# Altium PCB Battery supply.PcbDoc
Units mm, origin at the board's own origin, x right, y up, seen from the top; angles counter-clockwise.
Board outline 52.07 x 102.87 mm, 2 copper layers (Top Layer, Bottom Layer); 32 components, 14 nets, 111 pads, 35 vias.
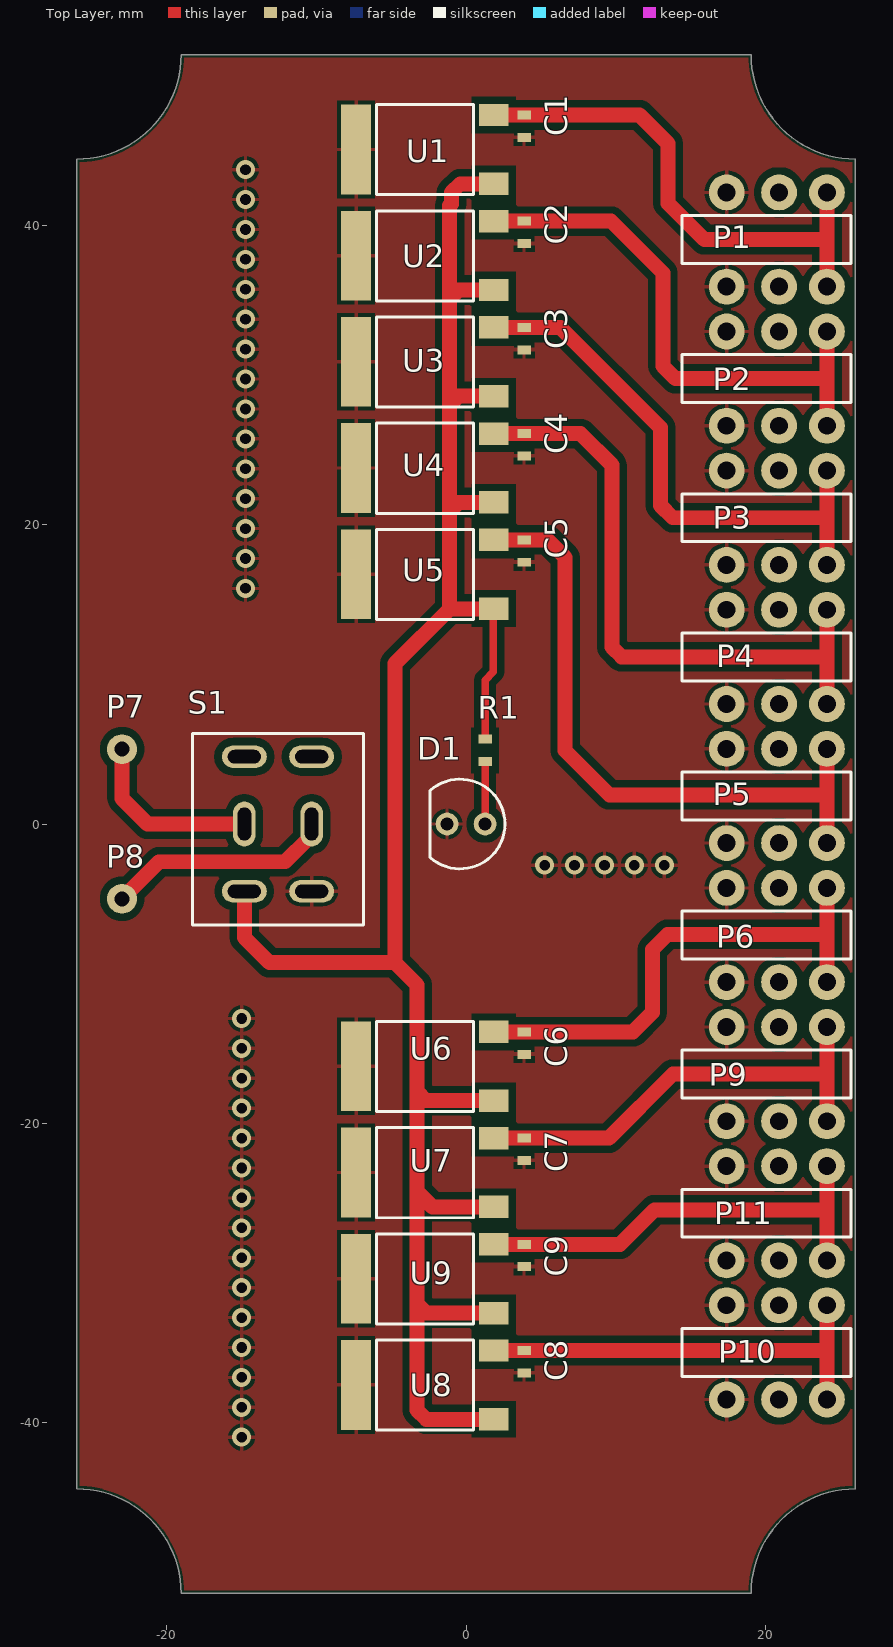
[diagram p0: Top Layer view]
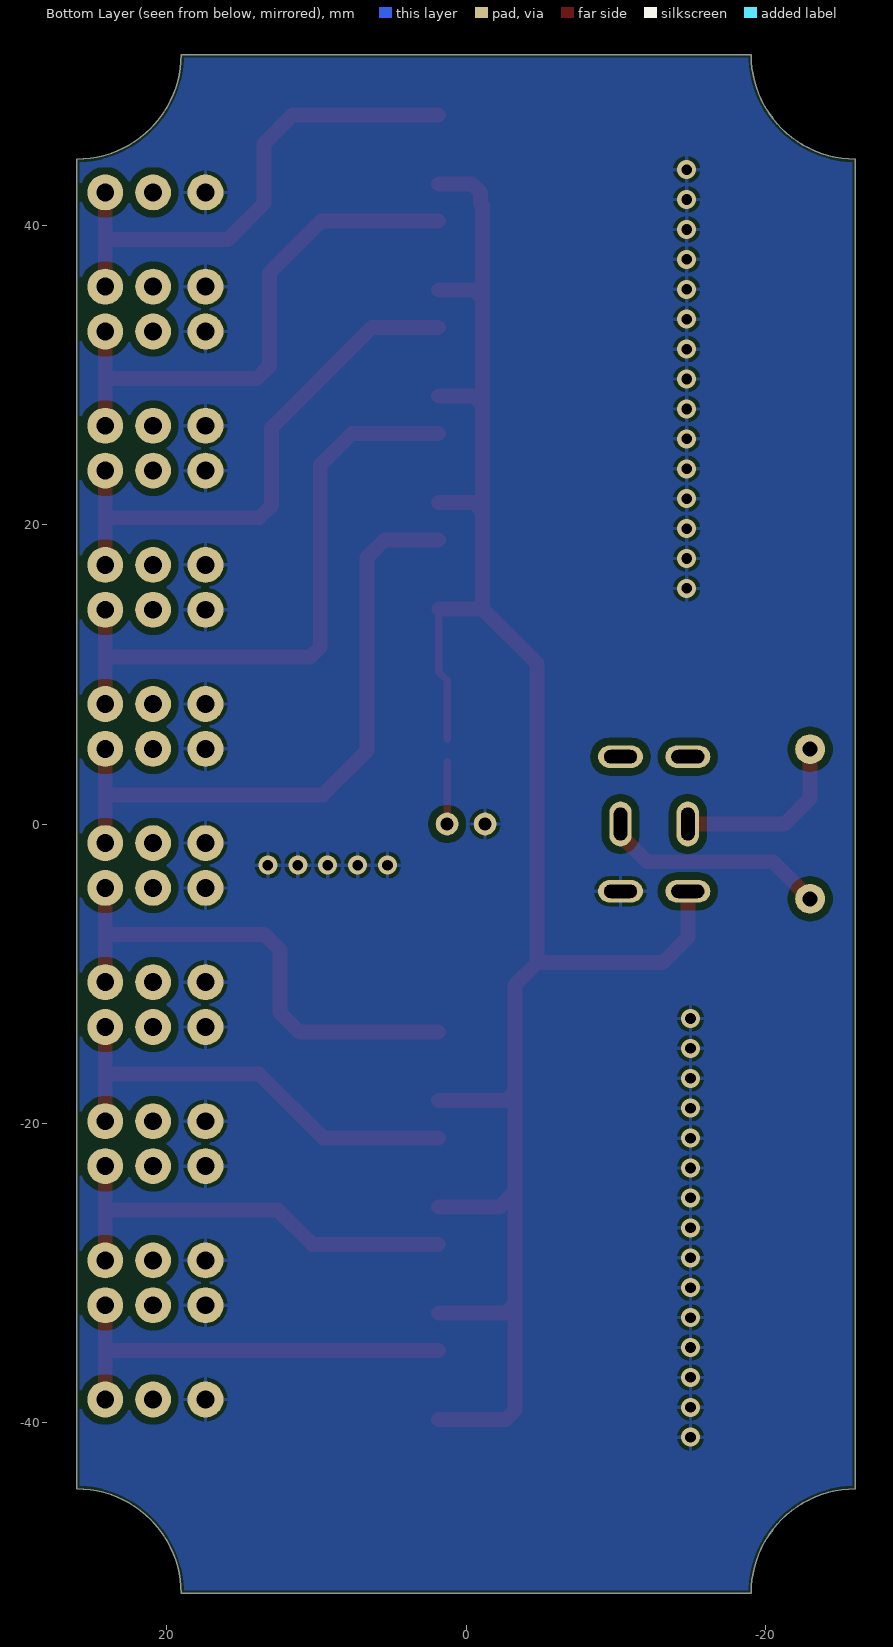
[diagram p1: Bottom Layer view, seen from below]
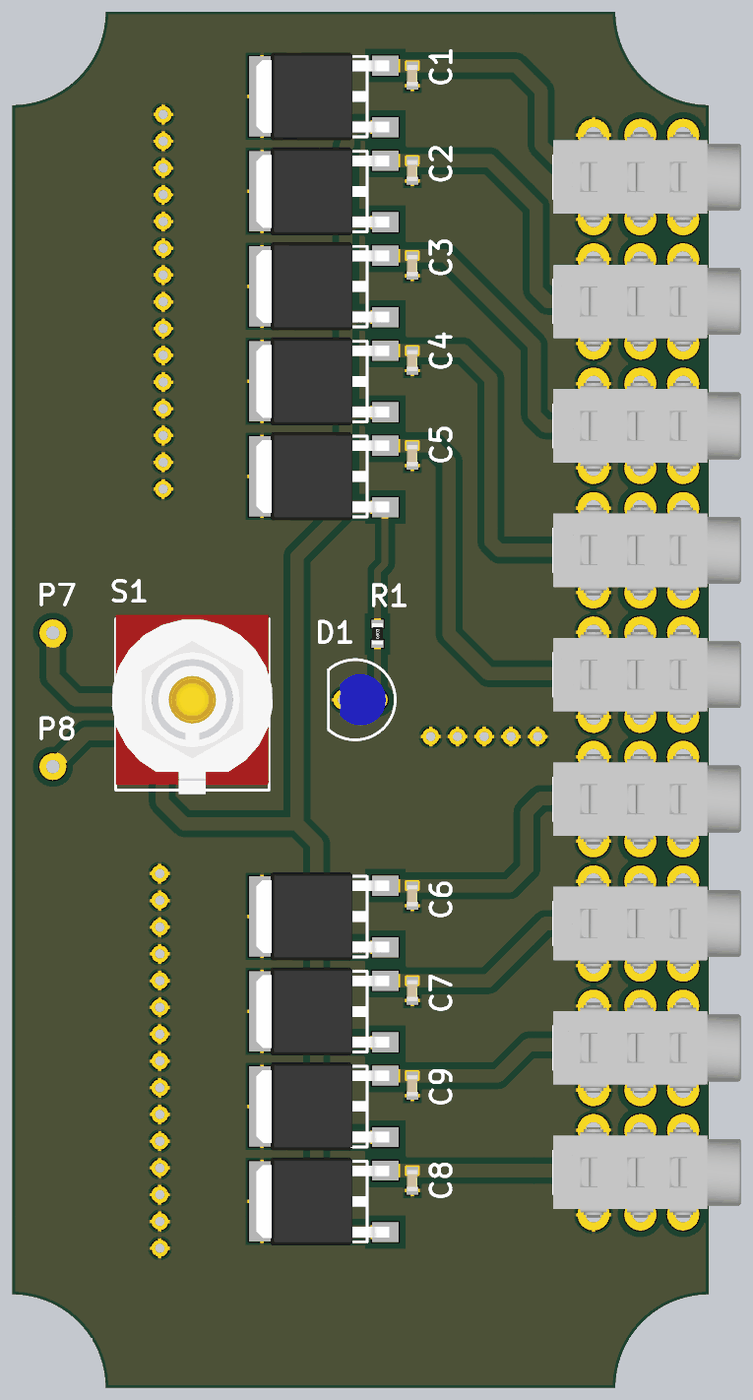
[diagram p2: 3D render of the assembled board from above, using the file's embedded part models]

## Layer stack, top to bottom
Top Solder: solder mask 0.0102, Solder Resist, Dk 3.5
Top Layer: signal copper 0.0356
Dielectric 1: dielectric 0.32, FR-4, Dk 4.8
Bottom Layer: signal copper 0.0356
Bottom Solder: solder mask 0.0102, Solder Resist, Dk 3.5

## Board outline
-26.035,-44.45 -26.035,44.45 ccw(c-26.035,51.435) -19.05,51.435 19.05,51.435 ccw(c26.035,51.435) 26.035,44.45 26.035,-44.45 ccw(c26.035,-51.435) 19.05,-51.435 -19.05,-51.435 ccw(c-26.035,-51.435)

## Design rules (kind name [scope] priority, off if disabled: settings)
BoardOutlineClearance [All] p1: gap=0.2 ignorepadtopadclearanceinfootprint=FALSE
Clearance [All] p1: gap=0.5 ignorepadtopadclearanceinfootprint=FALSE
Height [All] p1: minheight=0 maxheight=50 prefheight=12.7
HoleSize [All] p1: absolutevalues=TRUE maxlimit=6.3 minlimit=0.3 maxpercent=80.000 minpercent=20.000
HoleToHoleClearance [All] p1: gap=0.5 allowstackedmicrovias=TRUE
MinimumSolderMaskSliver [All] p1: minsoldermaskwidth=0.1
PolygonConnect [All] p1: connectstyle=Relief reliefconductorwidth=0.254 reliefentries=4 polygonreliefangle="90 Angle" airgapwidth=0.254
RoutingVias [All] p1: holewidth=0.5 width=1 viastyle="Through Hole" minholewidth=0.5 minwidth=1 maxholewidth=0.5 maxwidth=1
SilkToSilkClearance [All] p1: silktosilkclearance=0.1
SilkToSolderMaskClearance [IsPad] p1: minsilkscreentomaskgap=0.1 clearancetoexposedcopper=TRUE
SolderMaskExpansion [All] p1: expansion=0.102 istentingtop=FALSE
Width [All] p1: maxlimit=10 minlimit=0.5 preferedwidth=1
24 further rules are at their usual default settings.

## Components (designator, comment, footprint, x,y, rotation, side; value= is the part's Value field where it differs from the comment)
C1 "22μ 10V" "CAPACITOR 0603" 3.875,46.65 r90 top
C2 "22μ 10V" "CAPACITOR 0603" 3.875,39.55 r90 top
C3 "22μ 10V" "CAPACITOR 0603" 3.875,32.45 r90 top
C4 "22μ 10V" "CAPACITOR 0603" 3.875,25.35 r90 top
C5 "22μ 10V" "CAPACITOR 0603" 3.875,18.25 r90 top
C6 "22μ 10V" "CAPACITOR 0603" 3.875,-14.65 r90 top
C7 "22μ 10V" "CAPACITOR 0603" 3.875,-21.75 r90 top
C8 "22μ 10V" "CAPACITOR 0603" 3.875,-35.95 r90 top
C9 "22μ 10V" "CAPACITOR 0603" 3.875,-28.85 r90 top
D1 "Blue 3mm" "LED 3MM BLUE" 0,0 r0 top
P1 "PJ-3136-B" PJ-3136-B 25.925,39.075 r270 top
P2 "PJ-3136-B" PJ-3136-B 25.925,29.775 r270 top
P3 "PJ-3136-B" PJ-3136-B 25.925,20.475 r270 top
P4 "PJ-3136-B" PJ-3136-B 25.925,11.175 r270 top
P5 "PJ-3136-B" PJ-3136-B 25.925,1.875 r270 top
P6 "PJ-3136-B" PJ-3136-B 25.925,-7.425 r270 top
P7 "PAd" PAD -23,5 r90 top
P8 "PAd" PAD -23,-5 r90 top
P9 "PJ-3136-B" PJ-3136-B 25.925,-16.725 r270 top
P10 "PJ-3136-B" PJ-3136-B 25.925,-35.325 r270 top
P11 "PJ-3136-B" PJ-3136-B 25.925,-26.025 r270 top
R1 "1k" "RESISTOR 0603" 1.275,4.925 r90 top
S1 "1FD3T1B6M1QES-5" 1FD3T1B6M1QES-5 -12.575,0 r180 top
U1 "KIA78D09F-RTF/P" KIA78D09F-RTF/P 1.85,45.1 r90 top
U2 "KIA78D09F-RTF/P" KIA78D09F-RTF/P 1.85,38 r90 top
U3 "KIA78D09F-RTF/P" KIA78D09F-RTF/P 1.85,30.9 r90 top
U4 "KIA78D09F-RTF/P" KIA78D09F-RTF/P 1.85,23.8 r90 top
U5 "KIA78D09F-RTF/P" KIA78D09F-RTF/P 1.85,16.7 r90 top
U6 "KIA78D09F-RTF/P" KIA78D09F-RTF/P 1.85,-16.2 r90 top
U7 "KIA78D09F-RTF/P" KIA78D09F-RTF/P 1.85,-23.3 r90 top
U8 "KIA78D09F-RTF/P" KIA78D09F-RTF/P 1.85,-37.5 r90 top
U9 "KIA78D09F-RTF/P" KIA78D09F-RTF/P 1.85,-30.4 r90 top

## Footprints (in the part's own frame and the unit in brackets; to place one, negate y for a bottom-side part, rotate by r counter-clockwise, add the part's x,y. Pads: shape width x height; smd on the part's side, far side on the other; paste and mask are expansions set on the pad)
1FD3T1B6M1QES-5 [mm]
  oval 3x1.5 hole 0.9 slot 2.2 at 0 deg: 1(2.25,-4.5) 3(2.25,4.5) 4(-2.25,-4.5) 6(-2.25,4.5)
  oval 1.5x3 hole 0.9 slot 2.2 at 90 deg: 2(2.25,0) 5(-2.25,0)
  silkscreen extent -5.72,-6.05 5.72,6.75, body extent -6.03,-6.35 6.03,7.05, height 28.83
"CAPACITOR 0603" [mm]
  rect 0.6x0.9 smd: 1(-0.75,0) 2(0.75,0)
  body extent -0.8,-0.4 0.8,0.4, height 0.8
KIA78D09F-RTF/P [mm]
  rect 1.5x2 smd: 1(-2.3,0) 3(2.3,0)
  rect 6x2 smd: 2(0,9.2)
  silkscreen extent -3.03,1.35 3,7.85, body extent -3.29,-0.29 3.29,9.65, height 2.29
"LED 3MM BLUE" [mil]
  round 60 hole 33.46: 1(-50,0) 2(50,0)
  silkscreen extent -94,-118 102,118, body extent -60,-75 75,75, height 379
PAD [mm]
  round 2 hole 1: 1(0,0)
PJ-3136-B [mm]
  round 2.4 hole 1.2: 2(-3.15,-1.8) 2(3.15,-1.8) 3(-3.15,-5) 3(3.15,-5) 4(-3.15,-8.5) 4(3.15,-8.5)
  silkscreen extent -1.6,-11.5 1.6,-0.2, body extent -3.37,-11.5 3.37,2.5, height 5.5
"RESISTOR 0603" [mm]
  rect 0.6x0.9 smd: 1(-0.75,0) 2(0.75,0)
  body extent -0.8,-0.4 0.8,0.4, height 0.45

## Part data
C1 C2 C3 C4 C5 C6 C7 C8 C9: library part "Capacitor 22μF 0603 ±10% 10V", "X5R ±20% 10V 22uF 0603 Multilayer Ceramic Capacitors MLCC - SMD/SMT ROHS", LCSC Part #=C60077, Mfr. Part #=0603X226M100NT, Package=0603, ComponentLink1Description=Datasheet, ComponentLink1URL=https://datasheet.lcsc.com/lcsc/1811151152_FH-Guangdong-Fenghua-Advanced-Tech-0603X226M100NT_C60077.pdf, Type=SMD
D1: library part "Diode LED Blue 3mm THT", "Blue 460nm~470nm 2.7V~3.6V Through Hole Light Emitting Diodes (LED) ROHS", LCSC Part #=C330760, Mfr. Part #=TJ-L3FYTGCBMCGSFLC6B-A5, Package="Through Hole", ComponentLink1Description=Datasheet, ComponentLink1URL=https://datasheet.lcsc.com/lcsc/2006301911_TOGIALED-TJ-L3FYTGCBMCGSFLC6B-A5_C330760.pdf, Type=THT
P1 P2 P3 P4 P5 P6 P9 P10 P11: library part "Mechanical Headphone Holder JACK PJ-3136-B", "3.5mm Plug-in headphone holder Horizontal 6 Female DIP Audio & Video Connectors ROHS", LCSC Part #=C381131, Package=DIP, ComponentLink1Description=Datasheet, ComponentLink1URL=https://datasheet.lcsc.com/lcsc/1912111437_XKB-Connectivity-PJ-3136-B_C381131.pdf, Mfr. Part #=PJ-3136-B, Type=THT
P7 P8: library part "Mechanical PAD 1mm", "Pad 1mm"
R1: library part "Resistor 1kΩ 0603 ±1% 0.1W", "±1% ±100ppm/℃ 1kΩ 0.1W 0603 Chip Resistor - Surface Mount ROHS", LCSC Part #=C22548, Mfr. Part #=RC0603FR-071KL, Package=0603, ComponentLink1Description=Datasheet, ComponentLink1URL=https://datasheet.lcsc.com/lcsc/1810182020_YAGEO-RC0603FR-071KL_C22548.pdf, Type=SMD
S1: library part "Mechanical Toggle Switch ON-OFF-ON 1FD3T1B6M1QES-5", "H=10.5mm Toggle Switches ROHS", LCSC Part #=C908278, Package=H=10.5mm, ComponentLink1Description=Datasheet, ComponentLink1URL=https://datasheet.lcsc.com/lcsc/2011111736_Dailywell-1FD3T1B6M1QES-5_C908278.pdf, Mfr. Part #=1FD3T1B6M1QES-5, Type=THT
U1 U2 U3 U4 U5 U6 U7 U8 U9: library part "IC LDO 9V 500mA KIA78D09F-RTF/P", "25V 500mV @ 500mA Fixed 9V TO-252-2(DPAK) Linear Voltage Regulators (LDO) ROHS", LCSC Part #=C69764, Package=TO-252-2(DPAK), ComponentLink1Description=Datasheet, ComponentLink1URL=https://datasheet.lcsc.com/lcsc/1810121816_KEC-Semicon-KIA78D09F-RTF-P_C69764.pdf, Mfr. Part #=KIA78D09F-RTF/P, Type=SMD

## Via types
v1: diameter 1.27, hole 0.711, Top Layer to Bottom Layer, 35 vias

## Nets (pads, with @x,y where several pads share a name; then routed paths per layer and width w, separated by ;. In a path a pad name is that pad's centre, name@x,y a point inside that pad or via, vN(x,y) a via of type N, cw(c..) or ccw(c..) an arc to the next point about the centre after c; other vN are vias at no path point)
GND: C1.1 C2.1 C3.1 C4.1 C5.1 C6.1 C7.1 C8.1 C9.1 D1.1 P1.4 P2.4 P3.4 P4.4 P5.4 P6.4 P9.4 P10.4 P11.4 S1.6 U1.2 U2.2 U3.2 U4.2 U5.2 U6.2 U7.2 U8.2 U9.2
  other v1: -15,-41 -15,-39 -15,-37 -15,-35 -15,-33 -15,-31 -15,-29 -15,-27 -15,-25 -15,-23 -15,-21 -15,-19 -15,-17 -15,-15 -15,-13 5.25,-2.75 7.25,-2.75 9.25,-2.75 11.25,-2.75 13.25,-2.75 -14.75,15.75 -14.75,17.75 -14.75,19.75 -14.75,21.75 -14.75,23.75 -14.75,25.75 -14.75,27.75 -14.75,29.75 -14.75,31.75 -14.75,33.75 -14.75,35.75 -14.75,37.75 -14.75,39.75 -14.75,41.75 -14.75,43.75
NetC1_2: C1.2 P1.2 U1.3 | length 34.4
  Top Layer w1: U1.3 C1.2 11.6,47.4 13.5,45.5 13.5,41.5 15.925,39.075 24.125,39.075 ; P1.2@24.125,35.925 24.125,39.075 ; P1.2@24.125,42.225 24.125,39.075
NetC2_2: C2.2 P2.2 U2.3 | length 36.6
  Top Layer w1: U2.3 C2.2 9.7,40.3 13.15,36.85 13.15,30.625 14,29.775 24.125,29.775 ; P2.2@24.125,26.625 24.125,29.775 ; P2.2@24.125,32.925 24.125,29.775
NetC3_2: C3.2 P3.2 U3.3 | length 36.9
  Top Layer w1: U3.3 C3.2 6.3,33.2 13,26.5 13,21.3 13.825,20.475 24.125,20.475 ; P3.2@24.125,17.325 24.125,20.475 ; P3.2@24.125,23.625 24.125,20.475
NetC4_2: C4.2 P4.2 U4.3 | length 41.9
  Top Layer w1: U4.3 C4.2 7.65,26.1 9.75,24 9.75,11.825 10.4,11.175 24.125,11.175 ; P4.2@24.125,8.025 24.125,11.175 ; P4.2@24.125,14.325 24.125,11.175
NetC5_2: C5.2 P5.2 U5.3 | length 43.2
  Top Layer w1: U5.3 C5.2 5.439,19 6.625,17.814 6.625,4.9 9.575,1.95 24.125,1.95 ; P5.2@24.125,-1.275 24.125,1.95 ; P5.2@24.125,5.025 24.125,1.95
NetC6_2: C6.2 P6.2 U6.3 | length 33.7
  Top Layer w1: U6.3 C6.2 11.15,-13.9 12.45,-12.6 12.45,-8.4 13.475,-7.375 24.125,-7.375 ; P6.2@24.125,-10.575 24.125,-7.375 ; P6.2@24.125,-4.275 24.125,-7.375
NetC7_2: C7.2 P9.2 U7.3 | length 30.3
  Top Layer w1: U7.3 C7.2 9.55,-21 13.825,-16.725 24.125,-16.725 ; P9.2@24.125,-19.875 24.125,-16.725 ; P9.2@24.125,-13.575 24.125,-16.725
NetC8_2: C8.2 P10.2 U8.3 | length 28.6
  Top Layer w1: U8.3 24.125,-35.2 ; P10.2@24.125,-38.475 24.125,-35.2 ; P10.2@24.125,-32.175 24.125,-35.2
NetC9_2: C9.2 P11.2 U9.3 | length 29.5
  Top Layer w1: U9.3 C9.2 10.288,-28.1 12.588,-25.8 24.125,-25.8 ; P11.2@24.125,-29.175 24.125,-25.8 ; P11.2@24.125,-22.875 24.125,-25.8
NetD1_2: D1.2 R1.1 | length 4.2
  Top Layer w0.5: D1.2 R1.1@1.27,4.17
NetP7_1: P7.1 S1.2 | length 12.2
  Top Layer w1: P7.1 -23,1.7 -21.3,0 S1.2
NetP8_1: P8.1 S1.5 | length 15.2
  Top Layer w1: P8.1 -20.525,-2.525 -12.1,-2.525 -10.488,-0.913 -10.488,-0.163 S1.5
NetR1_2: R1.2 S1.3 U1.1 U2.1 U3.1 U4.1 U5.1 U6.1 U7.1 U8.1 U9.1 | length 143.6
  Top Layer w0.5: R1.2 1.275,9.625 1.825,10.175 U5.1@1.825,14.375
  Top Layer w1: S1.3 -14.825,-7.594 -13.144,-9.275 -4.75,-9.275 ; U5.1@1.825,14.375 -1.1,14.375 ; U8.1 -2.662,-39.8 -3.275,-39.187 -3.275,-32.087 ; U9.1 -2.662,-32.7 -3.275,-32.087 ; U7.1 -2.25,-25.6 -3.275,-24.575 ; U6.1 -2.662,-18.5 -3.275,-17.887 ; U4.1 -0.514,21.5 -1.1,20.914 ; U3.1 -0.514,28.6 -1.1,28.014 ; U2.1 -0.514,35.7 -1.1,35.114 ; U1.1 -0.389,42.8 -0.975,42.214 -0.975,41.464 -1.1,41.339 -1.1,35.114 ; -4.75,-9.275 -4.75,10.725 -1.1,14.375 ; -4.75,-9.275 -3.275,-10.75 -3.275,-17.887 ; -3.275,-32.087 -3.275,-24.575 ; -3.275,-24.575 -3.275,-17.887 ; -1.1,14.375 -1.1,20.914 ; -1.1,20.914 -1.1,28.014 ; -1.1,28.014 -1.1,35.114
pads on no net: P1.3 P2.3 P3.3 P4.3 P5.3 P6.3 P9.3 P10.3 P11.3 S1.1 S1.4

## Polygon pours and split planes (outlines as drawn)
GND on Top Layer "NONET_L-01_P-001" (solid, pour order 0): -27.5,-52.5 27.5,-52.5 27.5,52.5 -27.5,52.5
GND on Bottom Layer "NONET_L-01_P-001" (solid, pour order 1): -27.5,-52.5 27.5,-52.5 27.5,52.5 -27.5,52.5

## Silkscreen, mask and mechanical layers (free items; w line width, h text height)
Outline:
  the board outline again, w0.05